# Altium PCB PCB1.PcbDoc (part 1 of 2)
Units mil, origin at the board's own origin, x right, y up, seen from the top; angles counter-clockwise.
Board outline 12061.74 x 5475 mil, 2 copper layers (Top Layer, Bottom Layer); 155 components, 105 nets, 597 pads, 54 vias.
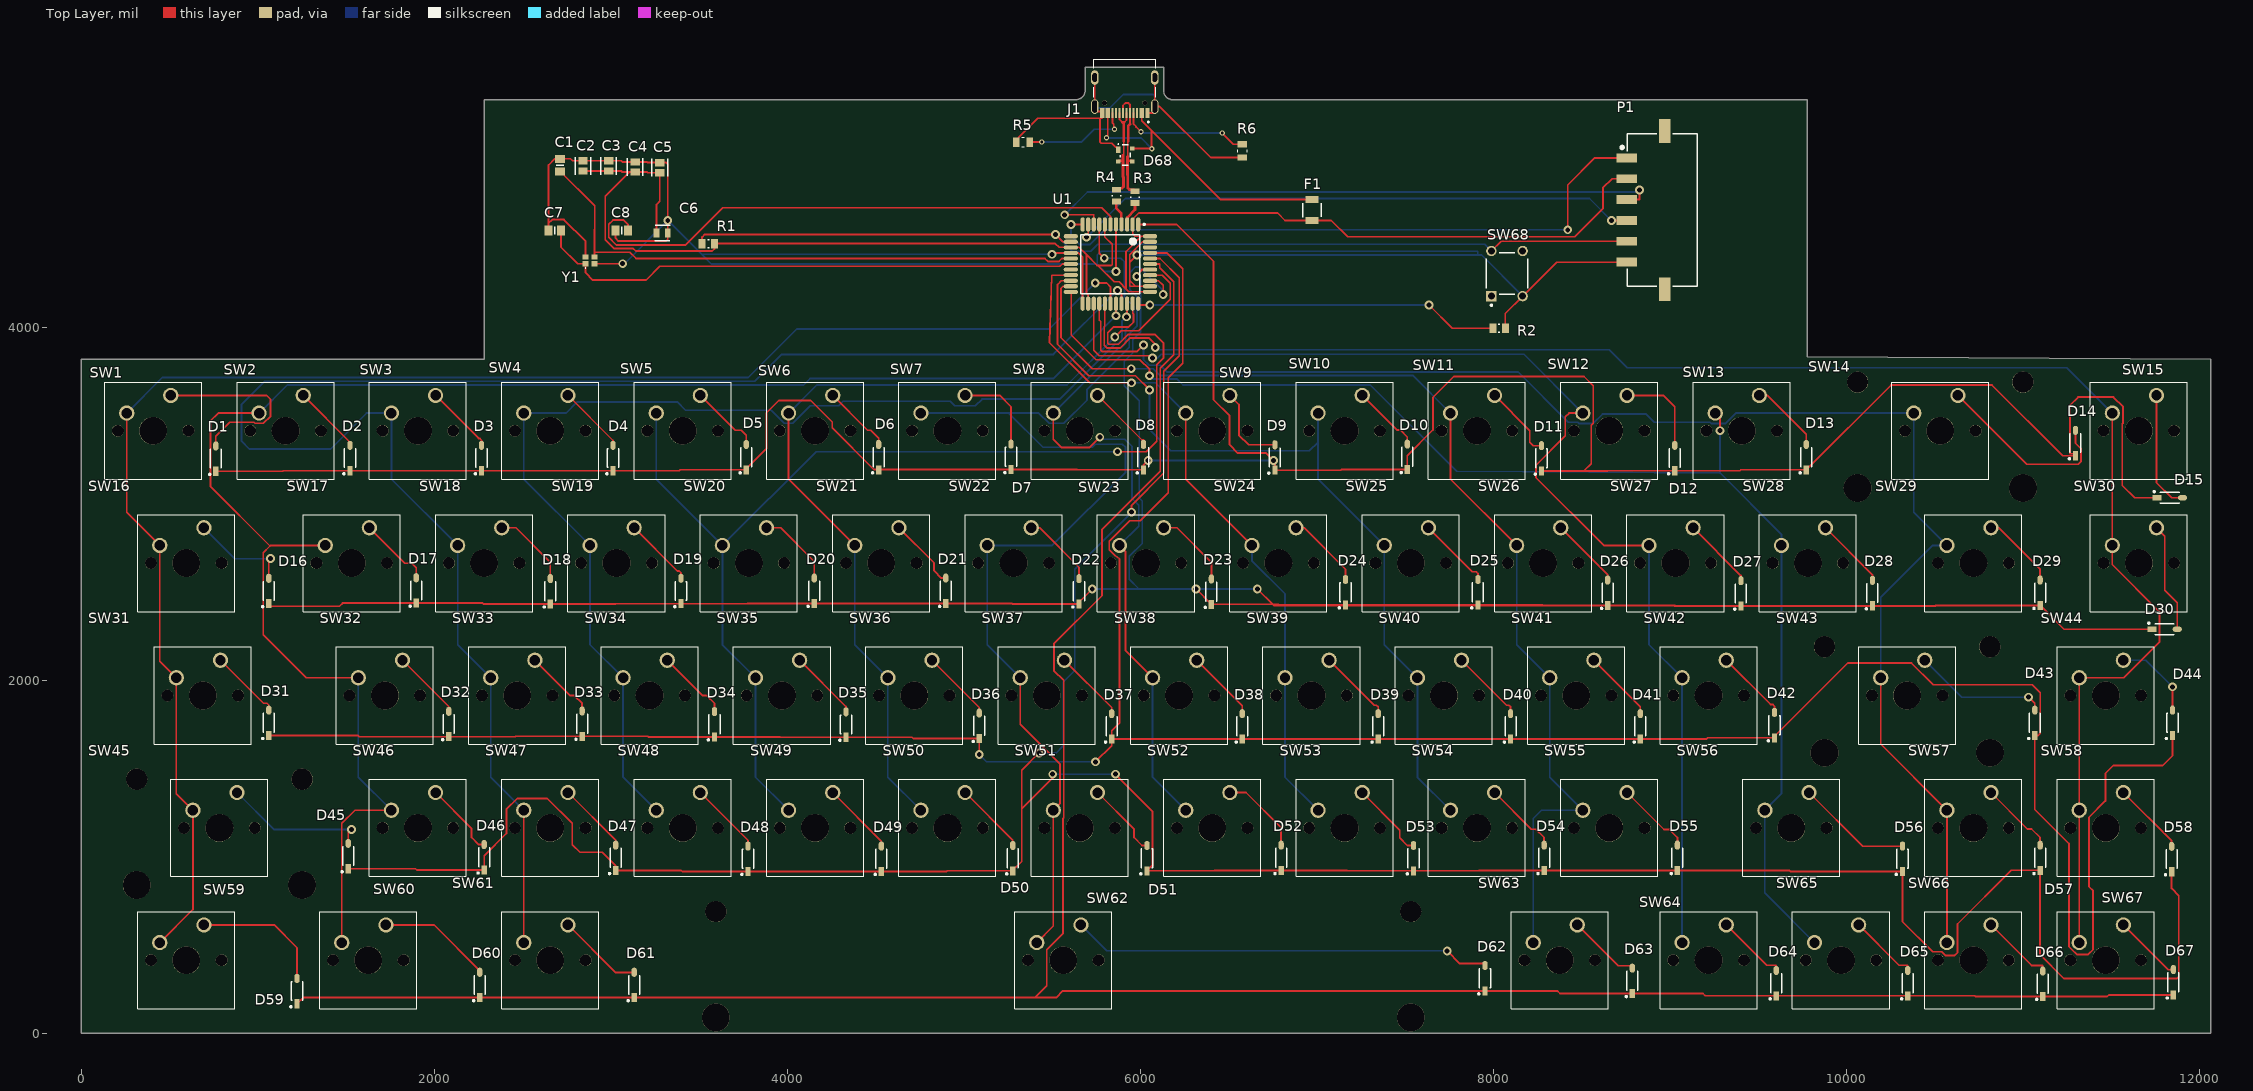
[diagram p0: Top Layer view]
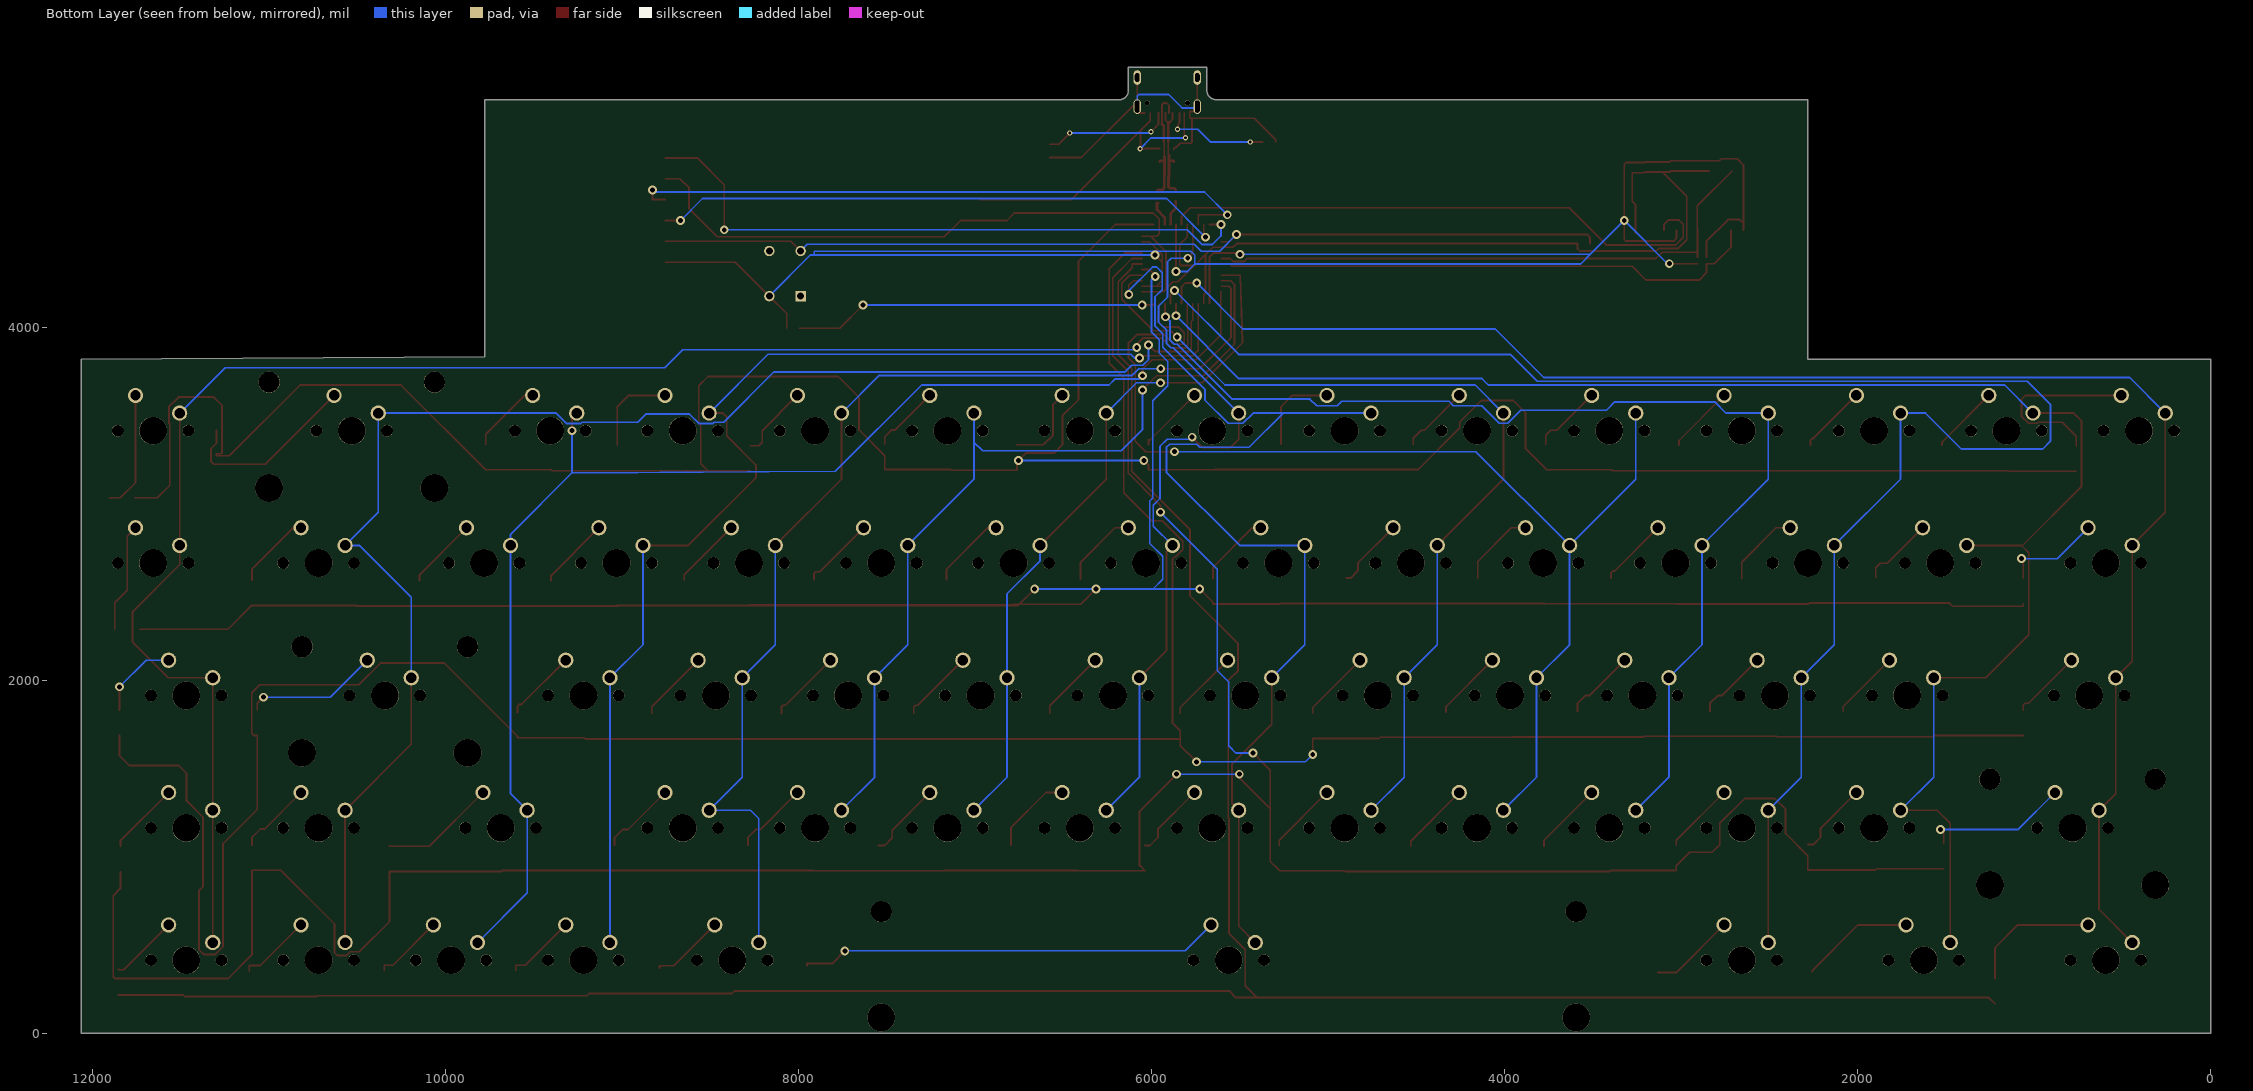
[diagram p1: Bottom Layer view, seen from below]
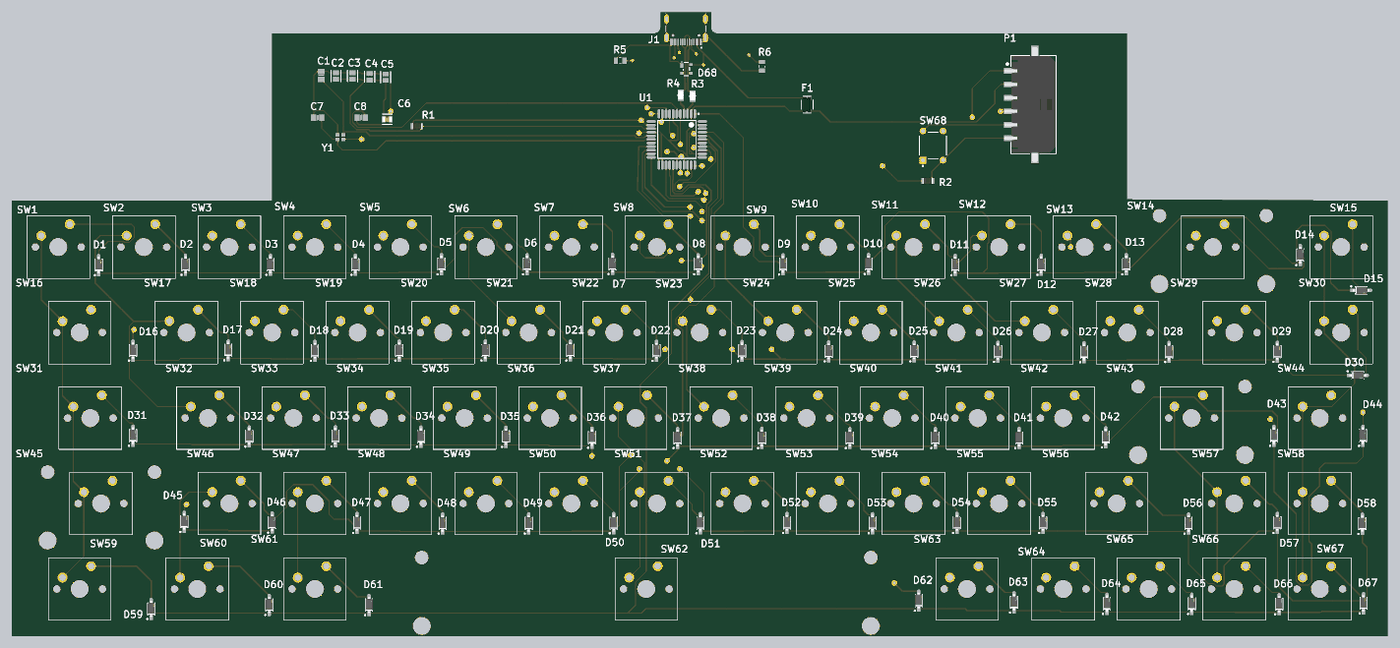
[diagram p3: 3D render of the assembled board from above, using the file's embedded part models]

## Layer stack, top to bottom
Top Solder: solder mask 0.4, Solder Resist, Dk 3.5
Top Layer: signal copper 1.4
Dielectric 1: dielectric 12.6, FR-4, Dk 4.8
Bottom Layer: signal copper 1.4
Bottom Solder: solder mask 0.4, Solder Resist, Dk 3.5

## Board outline
5631.31,5290 ccw(c5631.31,5345) 5686.31,5345 5686.31,5475 6131.31,5475 6131.31,5340 ccw(c6181.31,5340) 6181.31,5290 9776.31,5290 9776.31,3833.36 12061.74,3820.93 12061.74,0 0,0 0,3820.93 2281.31,3820.93 2281.31,5290

## Design rules (kind name [scope] priority, off if disabled: settings)
Clearance [All] p1: gap=7 ignorepadtopadclearanceinfootprint=FALSE
DiffPairsRouting DiffPair_DiffPairsRouting [InDifferentialPair ('TR')] p1: maxlimit=12 minlimit=10 mostfreqgap=10 toplayer_minwidth=15 toplayer_maxwidth=15 toplayer_prefwidth=15 bottomlayer_minwidth=15 bottomlayer_maxwidth=15 bottomlayer_prefwidth=15 maxuncoupledlength=500
DiffPairsRouting DiffPair_DiffPairsRouting_1 [InDifferentialPair ('TR')] p2: maxlimit=10 minlimit=10 mostfreqgap=10 toplayer_minwidth=15 toplayer_maxwidth=15 toplayer_prefwidth=15 bottomlayer_minwidth=15 bottomlayer_maxwidth=15 bottomlayer_prefwidth=15 maxuncoupledlength=500
DiffPairsRouting DiffPair_DiffPairsRouting_2 [InDifferentialPair ('TR')] p3: maxlimit=10 minlimit=10 mostfreqgap=10 toplayer_minwidth=15 toplayer_maxwidth=10 toplayer_prefwidth=10 bottomlayer_minwidth=15 bottomlayer_maxwidth=10 bottomlayer_prefwidth=10 maxuncoupledlength=500
DiffPairsRouting [All] p4: maxlimit=10 minlimit=7 mostfreqgap=10 toplayer_minwidth=15 toplayer_maxwidth=15 toplayer_prefwidth=15 bottomlayer_minwidth=15 bottomlayer_maxwidth=15 bottomlayer_prefwidth=15 maxuncoupledlength=500
MatchedLengths DiffPair_MatchedLengths [InDifferentialPair ('TR')] p1: tolerance=1000 checknetsindiffpair=FALSE checkdiffpairvsdiffpair=TRUE checkxsignals=TRUE checkothers=TRUE
MatchedLengths DiffPair_MatchedLengths_1 [InDifferentialPair ('TR')] p2: tolerance=1000 checknetsindiffpair=FALSE checkdiffpairvsdiffpair=TRUE checkxsignals=TRUE checkothers=TRUE
MatchedLengths DiffPair_MatchedLengths_2 [InDifferentialPair ('TR')] p3: tolerance=1000 checknetsindiffpair=FALSE checkdiffpairvsdiffpair=TRUE checkxsignals=TRUE checkothers=TRUE
PolygonConnect [All] p1: connectstyle=Relief reliefconductorwidth=10 reliefentries=4 polygonreliefangle="90 Angle" airgapwidth=10
RoutingVias [All] p1: holewidth=28 width=50 viastyle="Through Hole" minholewidth=28 minwidth=50 maxholewidth=28 maxwidth=50
SilkToSolderMaskClearance [IsPad] p1: minsilkscreentomaskgap=7 clearancetoexposedcopper=TRUE
SolderMaskExpansion [All] p1: expansion=4 istentingtop=FALSE
Width [All] p1: maxlimit=10 minlimit=10 preferedwidth=10
28 further rules are at their usual default settings.

## Classes and differential pairs
component class "switch matrix": D1 D2 D3 D4 D5 D6 D7 D8 D9 D10 D11 D12 D13 D14 D15 D16 D17 D18 D19 D20 D21 D22 D23 D24 D25 D26 D27 D28 D29 D30 D31 D32 D33 D34 D35 D36 D37 D38 D39 D40 D41 D42 D43 D44 D45 D46 D47 D48 D49 D50 D51 D52 D53 D54 D55 D56 D57 D58 D59 D60 D61 D62 D63 D64 D65 D66 D67 SW1 SW2 SW3 SW4 SW5 SW6 SW7 SW8 SW9 SW10 SW11 SW12 SW13 SW14 SW15 SW16 SW17 SW18 SW19 SW20 SW21 SW22 SW23 SW24 SW25 SW26 SW27 SW28 SW29 SW30 SW31 SW32 SW33 SW34 SW35 SW36 SW37 SW38 SW39 SW40 SW41 SW42 SW43 SW44 SW45 SW46 SW47 SW48 SW49 SW50 SW51 SW52 SW53 SW54 SW55 SW56 SW57 SW58 SW59 SW60 SW61 SW62 SW63 SW64 SW65 SW66 SW67
component class Sheet1: C1 C2 C3 C4 C5 C6 C7 C8 D68 F1 J1 P1 R1 R2 R3 R4 R5 R6 SW68 U1 Y1
differential pair T: +T_P -T_N
differential pair TR: +TR_P -TR_N

## Components (designator, comment, footprint, x,y, rotation, side; value= is the part's Value field where it differs from the comment)
C1 "CL21C220JBANNNC" CAPC2012X140N 2711.31,4920 r90 top
C2 "" FP-CL21-IPC_C 2841.31,4915 r90 top
C3 "" FP-CL21-IPC_C 2986.31,4915 r90 top
C4 "" FP-CL21-IPC_C 3136.31,4908.57 r90 top
C5 "" FP-CL21-IPC_C 3276.31,4905 r90 top
C6 "" FP-CL21B106KOQNNNE-MFG 3289.82,4535 r180 top value=10uF
C7 "CL21C220JBANNNC" CAPC2012X140N 2681.31,4550 r180 top
C8 "CL21B105KAFNNNE" CAPC2012X140N 3061.31,4550 r180 top
D1 "1N4148W-TP" FP-SOD-123-IPC_A 761.31,3256.85 r90 top
D2 "1N4148W-TP" FP-SOD-123-IPC_A 1521.31,3260 r90 top
D3 "1N4148W-TP" FP-SOD-123-IPC_A 2266.31,3260 r90 top
D4 "1N4148W-TP" FP-SOD-123-IPC_A 3011.31,3260 r90 top
D5 "1N4148W-TP" FP-SOD-123-IPC_A 3766.31,3265 r90 top
D6 "1N4148W-TP" FP-SOD-123-IPC_A 4516.31,3265 r90 top
D7 "1N4148W-TP" FP-SOD-123-IPC_A 5266.31,3266.85 r90 top
D8 "1N4148W-TP" FP-SOD-123-IPC_A 6016.31,3265 r90 top
D9 "1N4148W-TP" FP-SOD-123-IPC_A 6761.31,3263.15 r90 top
D10 "1N4148W-TP" FP-SOD-123-IPC_A 7511.31,3266.85 r90 top
D11 "1N4148W-TP" FP-SOD-123-IPC_A 8271.31,3258.15 r90 top
D12 "1N4148W-TP" FP-SOD-123-IPC_A 9026.31,3260 r90 top
D13 "1N4148W-TP" FP-SOD-123-IPC_A 9771.31,3265 r90 top
D14 "1N4148W-TP" FP-SOD-123-IPC_A 11296.31,3345 r90 top
D15 "1N4148W-TP" FP-SOD-123-IPC_A 11831.31,3035 r0 top
D16 "1N4148W-TP" FP-SOD-123-IPC_A 1061.31,2506.85 r90 top
D17 "1N4148W-TP" FP-SOD-123-IPC_A 1896.31,2510 r90 top
D18 "1N4148W-TP" FP-SOD-123-IPC_A 2656.31,2505 r90 top
D19 "1N4148W-TP" FP-SOD-123-IPC_A 3396.31,2506.85 r90 top
D20 "1N4148W-TP" FP-SOD-123-IPC_A 4151.31,2508.15 r90 top
D21 "1N4148W-TP" FP-SOD-123-IPC_A 4896.31,2508.15 r90 top
D22 "1N4148W-TP" FP-SOD-123-IPC_A 5651.31,2505 r90 top
D23 "1N4148W-TP" FP-SOD-123-IPC_A 6401.31,2503.15 r90 top
D24 "1N4148W-TP" FP-SOD-123-IPC_A 7161.31,2500 r90 top
D25 "1N4148W-TP" FP-SOD-123-IPC_A 7911.31,2500 r90 top
D26 "1N4148W-TP" FP-SOD-123-IPC_A 8646.31,2496.85 r90 top
D27 "1N4148W-TP" FP-SOD-123-IPC_A 9401.31,2493.15 r90 top
D28 "1N4148W-TP" FP-SOD-123-IPC_A 10146.31,2495 r90 top
D29 "1N4148W-TP" FP-SOD-123-IPC_A 11096.31,2496.85 r90 top
D30 "1N4148W-TP" FP-SOD-123-IPC_A 11801.31,2290 r0 top
D31 "1N4148W-TP" FP-SOD-123-IPC_A 1061.31,1760 r90 top
D32 "1N4148W-TP" FP-SOD-123-IPC_A 2081.31,1753.15 r90 top
D33 "1N4148W-TP" FP-SOD-123-IPC_A 2836.31,1755 r90 top
D34 "1N4148W-TP" FP-SOD-123-IPC_A 3586.31,1751.85 r90 top
D35 "1N4148W-TP" FP-SOD-123-IPC_A 4331.31,1750 r90 top
D36 "1N4148W-TP" FP-SOD-123-IPC_A 5086.31,1743.15 r90 top
D37 "1N4148W-TP" FP-SOD-123-IPC_A 5836.31,1740 r90 top
D38 "1N4148W-TP" FP-SOD-123-IPC_A 6576.31,1740 r90 top
D39 "1N4148W-TP" FP-SOD-123-IPC_A 7346.31,1740 r90 top
D40 "1N4148W-TP" FP-SOD-123-IPC_A 8096.31,1740 r90 top
D41 "1N4148W-TP" FP-SOD-123-IPC_A 8831.31,1740 r90 top
D42 "1N4148W-TP" FP-SOD-123-IPC_A 9591.31,1746.85 r90 top
D43 "1N4148W-TP" FP-SOD-123-IPC_A 11066.31,1760 r90 top
D44 "1N4148W-TP" FP-SOD-123-IPC_A 11846.31,1760 r90 top
D45 "1N4148W-TP" FP-SOD-123-IPC_A 1511.31,1005 r90 top
D46 "1N4148W-TP" FP-SOD-123-IPC_A 2281.31,998.15 r90 top
D47 "1N4148W-TP" FP-SOD-123-IPC_A 3026.31,995 r90 top
D48 "1N4148W-TP" FP-SOD-123-IPC_A 3776.31,990 r90 top
D49 "1N4148W-TP" FP-SOD-123-IPC_A 4531.31,990 r90 top
D50 "1N4148W-TP" FP-SOD-123-IPC_A 5276.31,993.15 r90 top
D51 "1N4148W-TP" FP-SOD-123-IPC_A 6036.31,993.15 r90 top
D52 "1N4148W-TP" FP-SOD-123-IPC_A 6796.31,995 r90 top
D53 "1N4148W-TP" FP-SOD-123-IPC_A 7546.31,993.15 r90 top
D54 "1N4148W-TP" FP-SOD-123-IPC_A 8286.31,995 r90 top
D55 "1N4148W-TP" FP-SOD-123-IPC_A 9041.31,995 r90 top
D56 "1N4148W-TP" FP-SOD-123-IPC_A 10316.31,990 r90 top
D57 "1N4148W-TP" FP-SOD-123-IPC_A 11096.31,995 r90 top
D58 "1N4148W-TP" FP-SOD-123-IPC_A 11841.31,988.15 r90 top
D59 "1N4148W-TP" FP-SOD-123-IPC_A 1221.31,240 r90 top
D60 "1N4148W-TP" FP-SOD-123-IPC_A 2256.31,275 r90 top
D61 "1N4148W-TP" FP-SOD-123-IPC_A 3131.31,275 r90 top
D62 "1N4148W-TP" FP-SOD-123-IPC_A 7951.31,313.15 r90 top
D63 "1N4148W-TP" FP-SOD-123-IPC_A 8786.31,298.15 r90 top
D64 "1N4148W-TP" FP-SOD-123-IPC_A 9601.31,285 r90 top
D65 "1N4148W-TP" FP-SOD-123-IPC_A 10346.31,285 r90 top
D66 "1N4148W-TP" FP-SOD-123-IPC_A 11111.31,281.85 r90 top
D67 "1N4148W-TP" FP-SOD-123-IPC_A 11851.31,290 r90 top
D68 "PRTR5V0U2X,215" NXP-SOT143B-4_V 5913.31,4977 r0 top
F1 "Fuse_Bel_0ZCJ0025AF2E_eec" Bel_3216_0 6971.31,4665 r270 top
J1 "TYPE-C-31-M-12" HRO_TYPE-C-31-M-12 5910.52,5415.59 r180 top
P1 "662106145021" 662106145021 8956.31,4665 r90 top
R1 "RC0805FR-0710KL" RESC2013X60X35NL10T20 3551.31,4475 r0 top
R2 "RC0805FR-0710KL" RESC2013X60X35NL10T20 8031.31,3995 r180 top
R3 "CRCW080522R0FKEA" FP-CRCW0805-e3-IPC_C 5968.31,4738.5 r270 top
R4 "CRCW080522R0FKEA" FP-CRCW0805-e3-IPC_C 5863.31,4747 r270 top
R5 "RC0805FR-075K1L" RESC2012X60N 5333.71,5050 r0 top
R6 "RC0805FR-075K1L" RESC2012X60N 6576.31,5000 r270 top
SW1 "Switch_Key_Switch_MX1A-E1NW_eec" SW_Cherry_MX_1.00u_PCB 506.22,3614.71 r0 top
SW2 "Switch_Key_Switch_MX1A-E1NW_eec" SW_Cherry_MX_1.00u_PCB 1256.18,3614.71 r0 top
SW3 "Switch_Key_Switch_MX1A-E1NW_eec" SW_Cherry_MX_1.00u_PCB 2006.13,3614.71 r0 top
SW4 "Switch_Key_Switch_MX1A-E1NW_eec" SW_Cherry_MX_1.00u_PCB 2756.08,3614.71 r0 top
SW5 "Switch_Key_Switch_MX1A-E1NW_eec" SW_Cherry_MX_1.00u_PCB 3506.04,3614.71 r0 top
SW6 "Switch_Key_Switch_MX1A-E1NW_eec" SW_Cherry_MX_1.00u_PCB 4255.99,3614.71 r0 top
SW7 "Switch_Key_Switch_MX1A-E1NW_eec" SW_Cherry_MX_1.00u_PCB 5005.94,3614.71 r0 top
SW8 "Switch_Key_Switch_MX1A-E1NW_eec" SW_Cherry_MX_1.00u_PCB 5755.89,3614.71 r0 top
SW9 "Switch_Key_Switch_MX1A-E1NW_eec" SW_Cherry_MX_1.00u_PCB 6505.85,3614.71 r0 top
SW10 "Switch_Key_Switch_MX1A-E1NW_eec" SW_Cherry_MX_1.00u_PCB 7255.8,3614.71 r0 top
SW11 "Switch_Key_Switch_MX1A-E1NW_eec" SW_Cherry_MX_1.00u_PCB 8005.75,3614.71 r0 top
SW12 "Switch_Key_Switch_MX1A-E1NW_eec" SW_Cherry_MX_1.00u_PCB 8755.7,3614.71 r0 top
SW13 "Switch_Key_Switch_MX1A-E1NW_eec" SW_Cherry_MX_1.00u_PCB 9505.66,3614.71 r0 top
SW14 "Switch_Key_Switch_MX1A-E1NW_eec" SW_Cherry_MX_2.00u_PCB 10630.59,3614.71 r0 top
SW15 "Switch_Key_Switch_MX1A-E1NW_eec" SW_Cherry_MX_1.00u_PCB 11755.52,3614.71 r0 top
SW16 "Switch_Key_Switch_MX1A-E1NW_eec" SW_Cherry_MX_1.50u_PCB 693.71,2864.76 r0 top
SW17 "Switch_Key_Switch_MX1A-E1NW_eec" SW_Cherry_MX_1.00u_PCB 1631.15,2864.76 r0 top
SW18 "Switch_Key_Switch_MX1A-E1NW_eec" SW_Cherry_MX_1.00u_PCB 2381.11,2864.76 r0 top
SW19 "Switch_Key_Switch_MX1A-E1NW_eec" SW_Cherry_MX_1.00u_PCB 3131.06,2864.76 r0 top
SW20 "Switch_Key_Switch_MX1A-E1NW_eec" SW_Cherry_MX_1.00u_PCB 3881.01,2864.76 r0 top
SW21 "Switch_Key_Switch_MX1A-E1NW_eec" SW_Cherry_MX_1.00u_PCB 4630.96,2864.76 r0 top
SW22 "Switch_Key_Switch_MX1A-E1NW_eec" SW_Cherry_MX_1.00u_PCB 5380.92,2864.76 r0 top
SW23 "Switch_Key_Switch_MX1A-E1NW_eec" SW_Cherry_MX_1.00u_PCB 6130.87,2864.76 r0 top
SW24 "Switch_Key_Switch_MX1A-E1NW_eec" SW_Cherry_MX_1.00u_PCB 6880.82,2864.76 r0 top
SW25 "Switch_Key_Switch_MX1A-E1NW_eec" SW_Cherry_MX_1.00u_PCB 7630.78,2864.76 r0 top
SW26 "Switch_Key_Switch_MX1A-E1NW_eec" SW_Cherry_MX_1.00u_PCB 8380.73,2864.76 r0 top
SW27 "Switch_Key_Switch_MX1A-E1NW_eec" SW_Cherry_MX_1.00u_PCB 9130.68,2864.76 r0 top
SW28 "Switch_Key_Switch_MX1A-E1NW_eec" SW_Cherry_MX_1.00u_PCB 9880.63,2864.76 r0 top
SW29 "Switch_Key_Switch_MX1A-E1NW_eec" SW_Cherry_MX_1.50u_PCB 10818.07,2864.76 r0 top
SW30 "Switch_Key_Switch_MX1A-E1NW_eec" SW_Cherry_MX_1.00u_PCB 11755.52,2864.76 r0 top
SW31 "Switch_Key_Switch_MX1A-E1NW_eec" SW_Cherry_MX_1.75u_PCB 787.46,2114.8 r0 top
SW32 "Switch_Key_Switch_MX1A-E1NW_eec" SW_Cherry_MX_1.00u_PCB 1818.64,2114.8 r0 top
SW33 "Switch_Key_Switch_MX1A-E1NW_eec" SW_Cherry_MX_1.00u_PCB 2568.59,2114.8 r0 top
SW34 "Switch_Key_Switch_MX1A-E1NW_eec" SW_Cherry_MX_1.00u_PCB 3318.55,2114.8 r0 top
SW35 "Switch_Key_Switch_MX1A-E1NW_eec" SW_Cherry_MX_1.00u_PCB 4068.5,2114.8 r0 top
SW36 "Switch_Key_Switch_MX1A-E1NW_eec" SW_Cherry_MX_1.00u_PCB 4818.45,2114.8 r0 top
SW37 "Switch_Key_Switch_MX1A-E1NW_eec" SW_Cherry_MX_1.00u_PCB 5568.41,2114.8 r0 top
SW38 "Switch_Key_Switch_MX1A-E1NW_eec" SW_Cherry_MX_1.00u_PCB 6318.36,2114.8 r0 top
SW39 "Switch_Key_Switch_MX1A-E1NW_eec" SW_Cherry_MX_1.00u_PCB 7068.31,2114.8 r0 top
SW40 "Switch_Key_Switch_MX1A-E1NW_eec" SW_Cherry_MX_1.00u_PCB 7818.26,2114.8 r0 top
SW41 "Switch_Key_Switch_MX1A-E1NW_eec" SW_Cherry_MX_1.00u_PCB 8568.22,2114.8 r0 top
SW42 "Switch_Key_Switch_MX1A-E1NW_eec" SW_Cherry_MX_1.00u_PCB 9318.17,2114.8 r0 top
SW43 "Switch_Key_Switch_MX1A-E1NW_eec" SW_Cherry_MX_2.00u_PCB 10443.1,2114.8 r0 top
SW44 "Switch_Key_Switch_MX1A-E1NW_eec" SW_Cherry_MX_1.00u_PCB 11568.03,2114.8 r0 top
SW45 "Switch_Key_Switch_MX1A-E1NW_eec" SW_Cherry_MX_2.00u_PCB 881.2,1364.85 r0 top
SW46 "Switch_Key_Switch_MX1A-E1NW_eec" SW_Cherry_MX_1.00u_PCB 2006.13,1364.85 r0 top
SW47 "Switch_Key_Switch_MX1A-E1NW_eec" SW_Cherry_MX_1.00u_PCB 2756.08,1364.85 r0 top
SW48 "Switch_Key_Switch_MX1A-E1NW_eec" SW_Cherry_MX_1.00u_PCB 3506.04,1364.85 r0 top
SW49 "Switch_Key_Switch_MX1A-E1NW_eec" SW_Cherry_MX_1.00u_PCB 4255.99,1364.85 r0 top
SW50 "Switch_Key_Switch_MX1A-E1NW_eec" SW_Cherry_MX_1.00u_PCB 5005.94,1364.85 r0 top
SW51 "Switch_Key_Switch_MX1A-E1NW_eec" SW_Cherry_MX_1.00u_PCB 5755.89,1364.85 r0 top
SW52 "Switch_Key_Switch_MX1A-E1NW_eec" SW_Cherry_MX_1.00u_PCB 6505.85,1364.85 r0 top
SW53 "Switch_Key_Switch_MX1A-E1NW_eec" SW_Cherry_MX_1.00u_PCB 7255.8,1364.85 r0 top
SW54 "Switch_Key_Switch_MX1A-E1NW_eec" SW_Cherry_MX_1.00u_PCB 8005.75,1364.85 r0 top
SW55 "Switch_Key_Switch_MX1A-E1NW_eec" SW_Cherry_MX_1.00u_PCB 8755.7,1364.85 r0 top
SW56 "Switch_Key_Switch_MX1A-E1NW_eec" SW_Cherry_MX_1.75u_PCB 9786.89,1364.85 r0 top
SW57 "Switch_Key_Switch_MX1A-E1NW_eec" SW_Cherry_MX_1.00u_PCB 10818.07,1364.85 r0 top
SW58 "Switch_Key_Switch_MX1A-E1NW_eec" SW_Cherry_MX_1.00u_PCB 11568.03,1364.85 r0 top
SW59 "Switch_Key_Switch_MX1A-E1NW_eec" SW_Cherry_MX_1.50u_PCB 693.71,614.9 r0 top
SW60 "Switch_Key_Switch_MX1A-E1NW_eec" SW_Cherry_MX_1.25u_PCB 1724.9,614.9 r0 top
SW61 "Switch_Key_Switch_MX1A-E1NW_eec" SW_Cherry_MX_1.50u_PCB 2756.08,614.9 r0 top
SW62 "Switch_Key_Switch_MX1A-E1NW_eec" SW_Cherry_MX_6.25u_PCB 5662.15,614.9 r0 top
SW63 "Switch_Key_Switch_MX1A-E1NW_eec" SW_Cherry_MX_1.25u_PCB 8474.47,614.9 r0 top
SW64 "Switch_Key_Switch_MX1A-E1NW_eec" SW_Cherry_MX_1.00u_PCB 9318.17,614.9 r0 top
SW65 "Switch_Key_Switch_MX1A-E1NW_eec" SW_Cherry_MX_1.00u_PCB 10068.12,614.9 r0 top
SW66 "Switch_Key_Switch_MX1A-E1NW_eec" SW_Cherry_MX_1.00u_PCB 10818.07,614.9 r0 top
SW67 "Switch_Key_Switch_MX1A-E1NW_eec" SW_Cherry_MX_1.00u_PCB 11568.03,614.9 r0 top
SW68 "1825910-6" TECO-1825910-6_V 8076.31,4305 r90 top
U1 "ATmega32U4-AU" 44ML_M 5829.31,4359 r270 top
Y1 "ABM11W-16.0000MHZ-8-D1X-T3" ABM11W300000MHZ4B1UT3 2881.31,4380 r0 top

## Footprints (in the part's own frame and the unit in brackets; to place one, negate y for a bottom-side part, rotate by r counter-clockwise, add the part's x,y. Pads: shape width x height; smd on the part's side, far side on the other; paste and mask are expansions set on the pad)
44ML_M [mm] "Thin QFP, 44-Leads, Body 10x10mm, Pitch 0.8mm, IPC Low Density"
  oval 2.05x0.6 smd: 1(-5.7,4) 2(-5.7,3.2) 3(-5.7,2.4) 4(-5.7,1.6) 5(-5.7,0.8) 6(-5.7,0) 7(-5.7,-0.8) 8(-5.7,-1.6) 9(-5.7,-2.4) 10(-5.7,-3.2) 11(-5.7,-4) 23(5.7,-4) 24(5.7,-3.2) 25(5.7,-2.4) 26(5.7,-1.6) 27(5.7,-0.8) 28(5.7,0) 29(5.7,0.8) 30(5.7,1.6) 31(5.7,2.4) 32(5.7,3.2) 33(5.7,4)
  oval 0.6x2.05 smd: 12(-4,-5.7) 13(-3.2,-5.7) 14(-2.4,-5.7) 15(-1.6,-5.7) 16(-0.8,-5.7) 17(0,-5.7) 18(0.8,-5.7) 19(1.6,-5.7) 20(2.4,-5.7) 21(3.2,-5.7) 22(4,-5.7) 34(4,5.7) 35(3.2,5.7) 36(2.4,5.7) 37(1.6,5.7) 38(0.8,5.7) 39(0,5.7) 40(-0.8,5.7) 41(-1.6,5.7) 42(-2.4,5.7) 43(-3.2,5.7) 44(-4,5.7)
  silkscreen extent -5.82,-4.25 4.25,4.98, body extent -5,-5 5,5, height 1.2
662106145021 [mm] "3.00mm Male Single Row Angled Header, 6p"
  rect 1.27x2.92 smd: 1(7.5,5.12) 2(4.5,5.12) 3(1.5,5.12) 4(-1.5,5.12) 5(-4.5,5.12) 6(-7.5,5.12)
  rect 3.43x1.65 smd: MP1(-11.395,-0.35) MP2(11.395,-0.35)
  silkscreen extent -10.95,-5.03 10.95,6, body extent -12.82,-4.95 12.82,6.4, height 5.61
ABM11W300000MHZ4B1UT3 [mm]
  rect 0.875x0.775 smd: 1(-0.638,-0.487) 2(0.637,-0.487) 3(0.637,0.487) 4(-0.638,0.487)
  silkscreen extent -0.7,-1.15 -0.6,-1.05
Bel_3216_0 [mm]
  rect 1x1.9 smd paste+0 mask+0: 1(-1.5,0) 2(1.5,0)
  silkscreen extent -1,-1.32 1.02,1.33, body extent -2.1,-1.05 2.1,1.05, height 0.25
CAPC2012X140N [mm]
  rect 1.15x1.45 smd: 1(-0.9,0) 2(0.9,0)
  silkscreen extent 0,-0.55 0,0.55
FP-CL21-IPC_C [mil]
  rect 41.52x53.39 smd paste+0 mask+0: 1(-28.57,0) 2(28.57,0)
  silkscreen extent -49,-44 49,44, body extent -53,-32 53,32, height 10
FP-CL21B106KOQNNNE-MFG [mm]
  rect 0.825x1.325 smd paste+0 mask+0: 1(-0.8,0) 2(0.8,0)
  silkscreen extent -1.13,-1.14 1.05,1.13, body extent -1.31,-0.8 1.31,0.8, height 0.25
FP-CRCW0805-e3-IPC_C [mil]
  rect 31.75x51.5 smd paste+0 mask+0: 1(-33.5,0) 2(33.5,0)
  silkscreen extent -3,-25 3,25, body extent -53,-31 53,31, height 10
FP-SOD-123-IPC_A [mm]
  rect 1.308x0.762 smd paste+0 mask+0: 1(-1.825,0)
  rrect100% 1.308x0.762 smd paste+0 mask+0: 2(1.825,0)
  silkscreen extent -2.39,-0.8 1.35,1.01, body extent -2.98,-1.3 2.98,1.3, height 0.25
HRO_TYPE-C-31-M-12 [mm]
  rect 0.6x1.45 smd: A1B12(-3.25,5.095) A4B9(-2.45,5.095) B1A12(3.25,5.095) B4A9(2.45,5.095)
  rect 0.3x1.45 smd: A5(-1.25,5.095) A6(-0.25,5.095) A7(0.25,5.095) A8(1.25,5.095) B5(1.75,5.095) B6(0.75,5.095) B7(-0.75,5.095) B8(-1.75,5.095)
  oval 1.05x2.1 hole 0.65 slot 1.75 at 90 deg: S1(-4.32,4.18) S2(4.32,4.18)
  oval 1.05x2.1 hole 0.65 slot 1.25 at 90 deg: S3(-4.32,0) S4(4.32,0)
  round 0.7 hole 0.7 unplated: ""(-2.89,3.65) ""(2.89,3.65)
  silkscreen extent -4.47,-2.6 4.47,6.5
NXP-SOT143B-4_V [mm] "SOT143, 4-Leads, Body 3x1.4mm"
  rect 0.7x1 smd: 1(-1,0.75)
  rect 0.7x0.6 smd: 2(-1,-0.95) 3(1,-0.95) 4(1,0.95)
  silkscreen extent -1.05,-1.5 0.7,1.6, body extent -0.7,-1.5 0.7,1.5, height 1.1
RESC2012X60N [mm]
  rect 0.92x1.38 smd: 1(-0.955,0) 2(0.955,0)
  silkscreen extent -0.17,-0.68 0.17,0.68
RESC2013X60X35NL10T20 [mm] "Chip Resistor, 2-Leads, Body 2.1x1.35mm, IPC Medium Density"
  rect 1x1.35 smd: 1(-0.9,0) 2(0.9,0)
  silkscreen extent -0.1,-0.58 0.1,0.58, body extent -1.05,-0.68 1.05,0.67, height 0.6
SW_Cherry_MX_1.00u_PCB [mm]
  round 2.2 hole 1.5: 1(0,0) 2(-6.35,-2.54)
  round 4 hole 4: Un1(-2.54,-5.08)
  round 1.7 hole 1.7: Un2(-7.62,-5.08) Un3(2.54,-5.08)
  silkscreen extent -9.52,-12.07 4.45,1.9
SW_Cherry_MX_1.25u_PCB [mm]
  round 2.2 hole 1.5: 1(0,0) 2(-6.35,-2.54)
  round 4 hole 4: Un1(-2.54,-5.08)
  round 1.7 hole 1.7: Un2(-7.62,-5.08) Un3(2.54,-5.08)
  silkscreen extent -9.52,-12.06 4.45,1.91
SW_Cherry_MX_1.50u_PCB [mm]
  round 2.2 hole 1.5: 1(0,0) 2(-6.35,-2.54)
  round 4 hole 4: Un1(-2.54,-5.08)
  round 1.7 hole 1.7: Un2(-7.62,-5.08) Un3(2.54,-5.08)
  silkscreen extent -9.52,-12.07 4.45,1.9
SW_Cherry_MX_1.75u_PCB [mm]
  round 2.2 hole 1.5: 1(0,0) 2(-6.35,-2.54)
  round 4 hole 4: Un1(-2.54,-5.08)
  round 1.7 hole 1.7: Un2(-7.62,-5.08) Un3(2.54,-5.08)
  silkscreen extent -9.52,-12.06 4.45,1.91
SW_Cherry_MX_2.00u_PCB [mm]
  round 2.2 hole 1.5: 1(0,0) 2(-6.35,-2.54)
  round 4 hole 4: Un1(-2.54,-5.08) Un4(9.36,-13.32) Un5(-14.44,-13.32)
  round 1.7 hole 1.7: Un2(-7.62,-5.08) Un3(2.54,-5.08)
  round 3.05 hole 3.05: Un6(-14.44,1.92) Un7(9.36,1.92)
  silkscreen extent -9.52,-12.07 4.45,1.9
SW_Cherry_MX_6.25u_PCB [mm]
  round 2.2 hole 1.5: 1(0,0) 2(-6.35,-2.54)
  round 4 hole 4: Un1(-2.54,-5.08) Un4(47.46,-13.32) Un5(-52.54,-13.32)
  round 1.7 hole 1.7: Un2(-7.62,-5.08) Un3(2.54,-5.08)
  round 3.05 hole 3.05: Un6(-52.54,1.92) Un7(47.46,1.92)
  silkscreen extent -9.52,-12.06 4.45,1.91
TECO-1825910-6_V [mm] "Switch, 4-Leads, Body 5.99x5.99mm"
  rect 1.5x1.5 hole 0.99: 1(-3.25,2.25)
  round 1.5 hole 0.99: 2(3.25,2.25) 3(-3.25,-2.25) 4(3.25,-2.25)
  silkscreen extent -4.67,-3 3,2.99, body extent -3,-2.99 2.99,3, height 5

## Part data
C1 C7: "22pF Â±5% 50V Ceramic Capacitor C0G, NP0 0805 _2012 Metric_", Package="0805 Samsung", Availability=Unavailable, MF=Samsung, MP=CL21C220JBANNNC, Price=None, SnapEDA_Link=https://www.snapeda.com/parts/CL21C220JBANNNC/Samsung%20Electro-Mechanics/view-part/514319/?ref=snap
C2 C3 C4 C5: library part CMP-2000-05017-2, "CL21 Series 0805 100nF 50V ±10% Tolerance X7R Multilayer Ceramic Chip Capacitor", Capacitance=100nF, Case Code (Imperial)=0805, Case Code (Metric)=2012, Dielectric=X7R, Max Operating Temperature=125°C, Min Operating Temperature=-55°C, Tolerance=10%, Voltage=50V, Case/Package=0805, Contact Plating=Tin, Depth=1.25mm, Height=0.85mm, Lead Free="Lead Free", Length=2mm, Material=Ceramic, Mount="Surface Mount", Packaging="Tape and Reel", Radiation Hardening=No, Thickness=0.037inch, Voltage Rating=50V, Voltage Rating (DC)=50V, Width=0.049inch
C6: library part CMP-2000-06106-2, "CAP CER 10UF 16V X7R 0805", Capacitance=10uF, Manufacturer="Samsung Electro-Mechanics America, Inc", Manufacturer Part Number=CL21B106KOQNNNE, Temperature="-55°C to +125°C", Temperature Characteristic=X7R, Temperature Coefficient=15%, Temperature Range High=+125°C, Temperature Range Low=-55°C, Tolerance=10%, Voltage Rating=16V, Automotive=No, Category=Cap, ComponentLink2Description=Datasheet, ComponentLink2URL=http://www.samsungsem.com/servlet/FileDownload?path=productsearch&sname=CL21B106KOQNNNE.pdf&oname=CL21B106KOQNNNE.pdf, Device Class L1="Passive Components", Device Class L2=Capacitors, Device Class L3="Ceramic Capacitors", Digikey Description="CAP CER 10UF 16V X7R 0805", Height=1.4mm, Ipc Land Pattern Name=CAPC200125X125, Lead Free=Yes, Material=Ceramic, Octopart=https://octopart.com/cl21b106koqnnne-samsung-19832289, Package=CL21B106KOQNNNE, RoHS=TRUE
C8: "1ÂµF Â±10% 25V Ceramic Capacitor X7R 0805 (2012 Metric)", Package="0805 Samsung", Arrow_Electronics-Purchase-URL=https://snapeda.com/shop?store=Arrow+Electronics&id=544120, Arrow_Europe-Purchase-URL=https://snapeda.com/shop?store=Arrow+Europe&id=544120, Check_prices=https://www.snapeda.com/parts/CL21B105KAFNNNE/Samsung%20Electro-Mechanics/view-part/544120/?ref=eda, Digi-Key_Part_Number=1276-1066-1-ND, DigiKey-Purchase-URL=https://snapeda.com/shop?store=DigiKey&id=544120, MF="Samsung Electro-Mechanics", MP=CL21B105KAFNNNE, SnapEDA_Link=https://www.snapeda.com/parts/CL21B105KAFNNNE/Samsung%20Electro-Mechanics/view-part/544120/?ref=snap
D1 D2 D3 D4 D5 D6 D7 D8 D9 D10 D11 D12 D13 D14 D15 D16 D17 D18 D19 D20 D21 D22 D23 D24 D25 D26 D27 D28 D29 D30 D31 D32 D33 D34 D35 D36 D37 D38 D39 D40 D41 D42 D43 D44 D45 D46 D47 D48 D49 D50 D51 D52 D53 D54 D55 D56 D57 D58 D59 D60 D61 D62 D63 D64 D65 D66 D67: library part CMP-2000-04993-2, "DIODE GEN PURP 100V 150MA SOD123", Average Rectified Current=150mA, Capacitance=4pF, Forward Voltage=1V, Max Forward Surge Current (Ifsm)=1A, Max Operating Temperature=150°C, Max Repetitive Reverse Voltage (Vrrm)=100V, Max Reverse Leakage Current=5uA, Max Surge Current=2A, Min Operating Temperature=-65°C, Package Quantity=3000, Power Dissipation=400mW, Current Rating=150mA, Element Configuration=Single, Forward Current=150mA, Height=1.2mm, Lead Free="Lead Free", Length=2.85mm, Max Reverse Voltage (DC)=100V, Mount="Surface Mount", Number of Pins=2, Output Current=150mA, Packaging="Tape and Reel", Peak Non-Repetitive Surge Current=2A, Polarity=Standard, Radiation Hardening=No, Recovery Time=4ns, Reverse Recovery Time=4ns, Voltage Rating (DC)=100V, Width=1.8mm
D68: library part CMP-2000-05285-1, "Ultra Low Capacitance Double Rail-to-Rail ESD Protection Diode, 5.5 V, 1 pF, -40 to 85 degC, 4-Pin SOT143B, RoHS, Tape and Reel", Capacitance Value=16pF, ESD Protection Voltage=8KV@ContactDisc, Leakage Current=0.1uA, Manufacturer="NXP Semiconductors", Operating Temp Range=-40Cto85C, Operating Temperature Classification=Industrial, Operating Temperature Max Deg. C=85C, Operating Temperature Min Deg. C=-40C, Package / Case=SOT, Reverse Breakdown Voltage=6V, Reverse Stand-off Voltage=5.5V, Configuration=Quad, Datasheet URL=https://datasheet.ciiva.com/4479/prtr5v0u2x-102853-4479461.pdf, Datasheet Version="Rev. 02, 01/2008", Direction Type=Uni-Directional, Leakage Current (Max)=0.1uA, Manufacturer URL=http://www.nxp.com/, Mounting=SurfaceMount, Mounting Style=SurfaceMount, Number of Elements=1, Package Type=SOT, Packaging=TapeandReel, Pin Count=3+Tab, Polarity=Uni-Directional, Product Depth (mm)=1.4mm, Product Height (mm)=1mm, Product Length (mm)=3mm, Rad Hardened=No, Suppressor Type=DiodeArrays, Working Voltage=5.5V, Working Voltage (Max)=5.5V
F1: "FUSE PTC RESET FUSE 24V 250MA 1206", Digikey Part Number=507-1799-1-ND, Manufacturer=Bel, Mfg Package Ident=3216, Mouser Part Number=530-0ZCJ0025AF2E, Part Number=0ZCJ0025AF2E, Temperature="-40°C to +85°C", Temperature Range High=+85°C, Temperature Range Low=-40°C, Voltage=24V, ComponentLink1Description=Upverter, ComponentLink1URL=https://upverter.com/upn/revision/1ff9a5fd39562549/, ComponentLink2Description=Datasheet, ComponentLink2URL=https://www.belfuse.com/resources/CircuitProtection/datasheets/0ZCJ%20Nov2016.pdf, Digikey Description="FUSE PTC RESET FUSE 24V 250MA 1206", helpURL=https://upverter.com/upn/revision/1ff9a5fd39562549/, Lead Free=yes, Package=3216, Price=0.0950423728797, RoHS=TRUE, Supplier 1=Digi-Key, Supplier 2=Mouser, Supplier Part Number 1=507-1799-1-ND, Supplier Part Number 2=530-0ZCJ0025AF2E
J1: "USB Connectors 24 Receptacle 1 8.94*7.3mm RoHS", Package=Package, Availability=Unavailable, MF="HRO Electronics Co., Ltd.", MP=TYPE-C-31-M-12, Price=None, SnapEDA_Link=https://www.snapeda.com/parts/TYPE-C-31-M-12/HRO%20Electronics%20Co.,%20Ltd./view-part/3228496/?ref=snap
P1: library part CMP-1502-00486-1, "SMT Male Header WR-MPC3, with SMT Solder Tabs, Right Angled, Single Row, pitch 3 mm, 6 pins", Contact Resistance=10mOhm, Manufacturer="Wurth Elektronik", Operating Temperature=-40to105degC, Working Voltage=250VAC, Datasheet URL=https://katalog.we-online.de/em/datasheet/6621xx145021.pdf, Gender=Male, Manufacturer URL=http://www.we-online.de, Mounting Technology=SMT, Orientation=RightAngled, Package Reference=662106145021, Packaging=TapeandReel, Part Number=662106145021, Pin Number=6, Pitch=3mm, Publisher=WurthElektronik
R1 R2: library part CMP-1659-00013-4, "Chip Resistor, 10 KOhm, +/- 1%, 0.125 W, -55 to 155 degC, 0805 (2012 Metric), RoHS, Tape and Reel", Manufacturer=Yageo, Max Operating Temperature="155 degC", Min Operating Temperature="-55 degC", Package Quantity=5000, Voltage Rating="150 V", ComponentLink1Description="Manufacturer URL", ComponentLink1URL=http://www.yageo.com/, ComponentLink2Description=Datasheet, ComponentLink2URL=http://www.yageo.com/documents/recent/PYu-RC_Group_51_RoHS_L_04.pdf, DatasheetVersion="Rev. 4, 02/2016", Height="0.5 mm", Length="2 mm", Mount="Surface Mount", Mounting Technology="Surface Mount", PackageDescription="2-Pin Surface Mounted Device, Body 2 x 1.25 mm", PackageReference=0805, Packaging="Tape and Reel", Pins=2, REACH SVHC="No SVHC", RoHSCompliant=true
R3 R4: library part CMP-2001-03692-2, "RES Thick Film, 22Ω, 1%, 0.125W, 100ppm/°C, 0805", Case Code (Imperial)=0805, Case Code (Metric)=2012, Max Operating Temperature=155°C, Max Power Dissipation=125mW, Min Operating Temperature=-55°C, Package Quantity=5000, Resistance=22R, Temperature Coefficient=100ppm/°C, Tolerance=1%, Voltage Rating=150V, Case/Package=0805, Composition="Thick Film", Contact Plating=Tin, Depth=1.25mm, Features="Automotive AEC-Q200", Height=0.45mm, Lead Free="Lead Free", Length=2mm, Military Standard=Not, Mount="Surface Mount", Number of Terminations=2, Packaging="Tape and Reel", Power Rating=125mW, Radiation Hardening=No, Termination=SMD/SMT, Voltage Rating (DC)=150V, Weight=0.000194oz, Width=1.25mm
R5 R6: "Resistor: thick film; SMD; 0805; 5.1kÎ©; 0.125W; Â±1%; -55Ã·155Â°C", Package=None, Availability=Unavailable, MP=RC0805FR-075K1L, Price=None
SW1 SW2 SW3 SW4 SW5 SW6 SW7 SW8 SW9 SW10 SW11 SW12 SW13 SW14 SW15 SW16 SW17 SW18 SW19 SW20 SW21 SW22 SW23 SW24 SW25 SW26 SW27 SW28 SW29 SW30 SW31 SW32 SW33 SW34 SW35 SW36 SW37 SW38 SW39 SW40 SW41 SW42 SW43 SW44 SW45 SW46 SW47 SW48 SW49 SW50 SW51 SW52 SW53 SW54 SW55 SW56 SW57 SW58 SW59 SW60 SW61 SW62 SW63 SW64 SW65 SW66 SW67: "SWITCH PUSH SPST-NO 0.01A 12V", contact_current_rating="10 mA", Digikey Part Number=CH197-ND, Manufacturer="Key Switch", Mouser Part Number=540-MX1A-E1NW, Package=MX1A, Part Number=MX1A-E1NW, Temperature="-10°C to +70°C", Temperature Range High=+70°C, Temperature Range Low=-10°C, Voltage=12V, Category 2Bfae6F01857F03D=Pushbutton, Category 6A0Ba70159B8B1Cc=Keylock, Category 6E88A3825D3Cb54F=Uncategorized, Category 8Ce341E9Bf4C5724=Switches, Category A9A064Aa9A0A7267="Tactile / Jog", Category Db391633E8F300Fe="Industrial Control", ComponentLink1Description=Upverter, ComponentLink1URL=https://upverter.com/upn/revision/8244d7a80b28a9e1/, ComponentLink2Description=Datasheet, ComponentLink2URL=https://upverter.com/datasheet/a174b925b05052267a652262a41f429ea7a87855.pdf, contact_plating=Gold, contacts_type=SPST, Digikey Description="SWITCH PUSH SPST-NO 0.01A 12V", helpURL=https://upverter.com/upn/revision/8244d7a80b28a9e1/, Lead Free=yes, Mounting Type=lug, Num Pins=2, Orientation=Vertical, Price=0.741007758432, RoHS=TRUE, size_length="15.6 mm", size_width="15.6 mm", Supplier 1=Digi-Key, Supplier 2=Mouser, Supplier Part Number 1=CH197-ND, Supplier Part Number 2=540-MX1A-E1NW
SW68: library part CMP-1684-00021-1, "Tact Switch, SPST-NO, 0.05 A, -35 to 85 degC, 4-Pin THD, RoHS, Bulk", Actuator Color=Black, Contact Rating @ Voltage=0.05A@24VDC, Dielectric Strength=500VAC, Manufacturer="TE Connectivity", Maximum AC Voltage Rating=N/A, Maximum Contact Resistance=100mOhm, Maximum DC Voltage Rating=24V, Minimum Insulation Resistance=100MOhm, Operating Temperature=-35to85C, Package Description="4-Pin Through Hole Device, Body 5.99 x 5.99 mm, Pitch 6.5 mm", Package Reference=THD, Actuator Length=1.4mm, Actuator Material=PolybutyleneTerephthalate, Actuator Style=RoundButton, Base Material=N/A, Body Orientation=Straight, Bushing Type=Unthreaded, Contact Material=CopperAlloy, Contact Plating=Silver, Datasheet URL=http://www.te.com/commerce/DocumentDelivery/DDEController?Action=showdoc&DocId=Customer+Drawing%7F1825910%7FC9%7Fpdf%7FEnglish%7FENG_CD_1825910_C9.pdf%7F1825910-6, Datasheet Version="Rev. C9", Dimension=5.99x5mm, Electrical Life=100000Cycles, Family=1825910, Function=MomentaryContact, Housing Material=N/A, Illumination=N/R, Manufacturer URL=http://www.te.com, Mechanical Life=100000Cycles, Mounting=ThroughHole, Packaging=N/A, Part No=1825910-6, Pole Throw Configuration=SPST, Product Weight=N/A, RoHS=Yes, Seal Description=N/A, Seal Location=N/A, Switch Configuration=OFF(ON), Terminal Type=PCPins, Thread Size=N/R
U1: library part CMP-0095-00285-2, "8-bit AVR Microcontroller, 2.7-5.5V, 16MHz, 32KB Flash, 1KB EEPROM, 2.5KB SRAM, USB Controller, 44-pin TQFP, Industrial Grade (-40°C to 85°C), Ext Osc", ComponentLink1Description="Manufacturer URL", ComponentLink1URL=http://www.atmel.com/, ComponentLink2Description="ATmega16U4/32U4 Datasheet", ComponentLink2URL=http://www.atmel.com/dyn/resources/prod_documents/doc7766.pdf, ComponentLink3Description="ATmega16U4 ATmega32U4 Summary", ComponentLink3URL=http://www.atmel.com/dyn/resources/prod_documents/7766S.pdf, DatasheetVersion="revF, Nov-2010", PackageDescription="44-Pin Plastic Thin Quad Flat Pack, 10 x 10 x 1.0 mm Body, 0.8 mm Pitch (TQFP)", PackageReference=44ML, PackageVersion="rev.G, Jul-2007", RevisionNote="DatasheetVersion updated. URLs added."
Y1: "16MHz Â±10ppm Crystal 8pF 200 Ohms 4-SMD, No Lead", Package="SMD-4 Abracon", Availability=Warning, BuyPart=https://www.snapeda.com/parts/ABM11W-16.0000MHZ-8-D1X-T3/Abracon/view-part/2583382/?ref=eda, MF=Abracon, Mouser-Purchase-URL=https://snapeda.com/shop?store=Mouser&id=2583382, MP=ABM11W-16.0000MHZ-8-D1X-T3, Price=None, SnapEDA_Link=https://www.snapeda.com/parts/ABM11W-16.0000MHZ-8-D1X-T3/Abracon/view-part/2583382/?ref=snap

## Via types
v1: diameter 50, hole 28, Top Layer to Bottom Layer, 48 vias
v2: diameter 30, hole 15, Top Layer to Bottom Layer, 6 vias

## Nets (pads, with @x,y where several pads share a name; then routed paths per layer and width w, separated by ;. In a path a pad name is that pad's centre, name@x,y a point inside that pad or via, vN(x,y) a via of type N, cw(c..) or ccw(c..) an arc to the next point about the centre after c; other vN are vias at no path point)
+5: C2.1 C3.1 C4.1 C5.1 C6.2 F1.2 P1.2 R1.2 U1.2 U1.7 U1.14 U1.24 U1.34 U1.44 | length 8695.4
  Top Layer w10: C2.1@2841.31,4886.43 C3.1@2986.31,4886.43 3057.31,4886.43 3063.74,4880 3103.31,4880 ; C6.2@3258.32,4535 3258.32,4696 3276.31,4713.99 C5.1@3276.31,4876.43 3207.89,4876.43 3204.31,4880 C4.1@3136.31,4880 3103.31,4880 ; U1.24@5703.33,4134.59 5703.33,4183.07 5694.09,4192.31 5694.09,4410.71 ; U1.7@5797.82,4583.41 5797.82,4512 5839.31,4470.5 5839.31,4356 5834.31,4351 5757.83,4351 ; U1.34@6053.72,4201.52 5933.79,4201.52 5918.31,4217 ; U1.44@6053.72,4516.48 6004.79,4516.48 ; P1.2@8754.74,4842.17 8671.31,4842.17 8619.31,4790.17 8619.31,4672 8460.31,4513 7173.26,4513 7080.31,4605.94 F1.2@6971.31,4605.94 6818.31,4605.94 6776.26,4648 5989.16,4648 5955.3,4614.13 5955.3,4530 5968.82,4516.48 6004.79,4516.48 ; 3103.31,4880 2967.31,4744 2967.31,4497 3018.03,4446.28 3126.34,4446.28 3139.63,4433 3573.31,4433 3586.75,4446.43 R1.2@3586.75,4475 5517.12,4475 5538.63,4453.49 U1.14@5604.9,4453.49 5651.31,4453.49 5694.09,4410.71 ; 5694.09,4410.71 5753.8,4351 5757.83,4351 ; 5757.83,4351 5850,4258.83 5880.48,4258.83 5918.31,4217 ; 5918.31,4217 5918.31,4430 6004.79,4516.48
GND: C1.2 C2.2 C3.2 C4.2 C5.2 C6.1 C7.2 C8.2 P1.6 R2.1 SW68.3 U1.5 U1.15 U1.23 U1.35 U1.43 Y1.2 Y1.4 | length 14038.7
  Top Layer w10: C7.2@2645.88,4550 2645.88,4590 ; Y1.4@2856.19,4399.17 2856.19,4488.19 2733.38,4611 2666.88,4611 2645.88,4590 ; Y1.2@2906.39,4360.83 v1(3066.31,4360.83) ; C8.2@3025.88,4550 3025.88,4504.43 3041.31,4489 3311.31,4489 3321.31,4499 C6.1@3321.31,4535 v1(3321.31,4606) 3321.31,4923.57 3311.31,4933.57 C5.2@3276.31,4933.57 3207.89,4933.57 3204.31,4937.15 C4.2@3136.31,4937.15 3063.74,4937.15 3057.31,4943.57 C3.2@2986.31,4943.57 C2.2@2841.31,4943.57 2782.17,4943.57 2770.31,4955.43 C1.2@2711.31,4955.43 2681.75,4955.43 2645.88,4919.57 2645.88,4590 ; v1(5498.31,4414) 5506.3,4421.99 U1.15@5604.9,4421.99 5646.32,4421.99 5671.83,4396.48 U1.23@5671.83,4134.59 ; v1(5860.31,4317) 5860.81,4317.5 U1.5@5860.81,4583.41 ; v1(5979.31,4410) 5938.31,4369 ; U1.35@6053.72,4233.02 5971.31,4233.02 ; U1.43@6053.72,4484.98 6011.31,4484.98 5938.31,4411.98 5938.31,4369 ; R2.1@8066.75,3995 8066.75,4078.9 SW68.3@8164.89,4177.05 8357.57,4369.72 P1.6@8754.74,4369.72 ; 5938.31,4266.02 5971.31,4233.02 ; 5938.31,4266.02 5938.31,4237 5942.3,4233.02 5971.31,4233.02 ; 5938.31,4266.02 5938.31,4369
  Bottom Layer w10: v1(3066.31,4360.83) 3076.14,4360.83 v1(3321.31,4606) 3513.31,4414 ; v1(5498.31,4414) 3513.31,4414 ; v1(5860.31,4317) 5796.31,4317 5754.31,4359 ; v1(5979.31,4410) 7909.94,4410 ; SW68.3@8164.89,4177.05 7931.94,4410 7909.94,4410 ; 3513.31,4414 3568.31,4359 5754.31,4359 ; 5754.31,4359 5754.31,4410 5776.31,4432 7909.94,4432 7909.94,4410
NetC1_1: C1.1 U1.16 Y1.3 | length 3293.6
  Top Layer w10: C1.1@2711.31,4884.57 2907.31,4688.57 2906.39,4426.28 ; Y1.3@2906.39,4399.17 2906.39,4426.28 ; U1.16@5604.9,4390.5 5554.68,4390.5 5538.12,4373.93 5474.68,4373.93 5458.12,4390.5 3142.13,4390.5 3106.34,4426.28 2906.39,4426.28
NetC7_1: C7.1 U1.17 Y1.1 | length 3128.5
  Top Layer w10: C7.1@2716.74,4550 2716.74,4455.14 2811.05,4360.83 Y1.1@2856.19,4360.83 2856.19,4309.12 2897.31,4268 3198.31,4268 3276.31,4346 5543.31,4346 5556.31,4359 U1.17@5604.9,4359
NetC8_1: C8.1 U1.6 | length 3250.8
  Top Layer w10: C8.1@3096.74,4550 3096.74,4582.57 3071.31,4608 3011.31,4608 2987.31,4584 2987.31,4510 3031.03,4466.28 3420.6,4466.28 3632.33,4678.02 5781.29,4678.02 5829.31,4630 U1.6@5829.31,4583.41
NetD1_1: D1.1 D2.1 D3.1 D4.1 D5.1 D6.1 D7.1 D8.1 D9.1 D10.1 D11.1 D12.1 D13.1 D14.1 D15.1 U1.1 | length 16240.5
  Top Layer w10: D1.1@761.31,3185 1139.31,3185 1142.46,3188.15 D2.1@1521.31,3188.15 D3.1@2266.31,3188.15 D4.1@3011.31,3188.15 3386.31,3188.15 3391.31,3193.15 D5.1@3766.31,3193.15 3766.31,3199 3880.31,3313 3880.31,3515 3951.31,3586 4131.31,3586 4253.31,3464 4253.31,3431 4489.31,3195 4892.16,3195 ; D6.1@4516.31,3193.15 4890.31,3193.15 4892.16,3195 ; U1.1@5986.79,4583.41 5986.79,4583 6204.31,4583 6413.31,4374 6413.31,3590 6504.31,3499 6504.31,3335 6551.31,3288 6711.31,3288 v1(6753.31,3246) 6761.31,3238 D9.1@6761.31,3191.3 7134.31,3191.3 7138.01,3195 D10.1@7511.31,3195 7511.31,3274 7656.31,3419 7656.31,3603 7775.31,3722 8512.31,3722 8564.31,3670 8564.31,3456 8553.31,3445 8553.31,3228.3 8511.31,3186.3 ; v1(6043.31,3246) 6016.31,3219 D8.1@6016.31,3193.15 5642.16,3193.15 5640.31,3195 D7.1@5266.31,3195 4892.16,3195 ; D11.1@8271.31,3186.3 8511.31,3186.3 ; D15.1@11759.46,3035 11631.31,3035 11561.77,3104.54 11561.77,3453.54 11566.31,3458.08 11566.31,3550 11511.31,3605 11311.31,3605 11265.31,3559 11265.31,3284 11296.31,3284 D14.1@11296.31,3273.15 11296.31,3273 11224.31,3273 10823.31,3674 10252.16,3674 D13.1@9771.31,3193.15 9401.31,3193.15 9396.31,3188.15 D12.1@9026.31,3188.15 8649.16,3188.15 8647.31,3186.3 8511.31,3186.3
  Bottom Layer w10: v1(6043.31,3246) v1(6753.31,3246)
NetD1_2: D1.2 SW1.1 | length 1086.6
  Top Layer w10: SW1.1@506.23,3614.71 1047.99,3614.71 1071.31,3591.38 1071.31,3497.38 1030.33,3456.4 983.03,3456.4 976.25,3463.17 840.49,3463.17 761.31,3384 D1.2@761.31,3328.7
NetD2_2: D2.2 SW2.1 | length 392.7
  Top Layer w10: SW2.1@1256.18,3614.71 1521.31,3349.57 D2.2@1521.31,3331.85
NetD3_2: D3.2 SW3.1 | length 393.8
  Top Layer w10: SW3.1@2006.13,3614.71 2249.84,3371 2255.31,3371 2266.31,3360 D3.2@2266.31,3331.85
NetD4_2: D4.2 SW4.1 | length 388.6
  Top Layer w10: SW4.1@2756.08,3614.71 3011.31,3359.48 D4.2@3011.31,3331.85
NetD5_2: D5.2 SW5.1 | length 406.5
  Top Layer w10: SW5.1@3506.04,3614.71 3703.31,3417.43 3738.88,3417.43 3766.31,3390 D5.2@3766.31,3336.85
NetD6_2: D6.2 SW6.1 | length 396.2
  Top Layer w10: SW6.1@4255.99,3614.71 4453.31,3417.39 4471.31,3417.39 4516.31,3372.39 D6.2@4516.31,3336.85
NetD7_2: D7.2 SW7.1 | length 498.5
  Top Layer w10: SW7.1@5005.94,3614.71 5201.6,3614.71 5266.31,3550 D7.2@5266.31,3338.7
NetD8_2: D8.2 SW8.1 | length 390.5
  Top Layer w10: SW8.1@5755.89,3614.71 6008.22,3362.39 6016.31,3362.39 D8.2@6016.31,3336.85
NetD9_2: D9.2 SW9.1 | length 472.8
  Top Layer w10: SW9.1@6505.85,3614.71 6557.31,3563.24 6557.31,3390 6612.31,3335 D9.2@6761.31,3335
NetD10_2: D10.2 SW10.1 | length 393.6
  Top Layer w10: SW10.1@7255.8,3614.71 7451.31,3419.2 7471.31,3419.2 7511.31,3379.2 D10.2@7511.31,3338.7